# EAGLE board esp32_indoorbike (EAGLE 9.3.0)

Size 160 x 100 mm. Coordinates in mm from the lower left corner, seen from the top.
Outline: 0,0 160,0 160,100 0,100 0,0
Copper layers (1*16): Top 0.035mm / dielectric 1.5mm / Bottom 0.035mm
Design rules "default": minimum track width 6mil, minimum drill 0.35mm, track to track 6mil, track to pad 6mil, pad to pad 6mil, via to via 6mil, smd to smd 6mil, copper to edge 40mil, drill to drill 6mil, minimum pad ring 10mil, minimum via ring 8mil, stop-mask expansion 4mil, vias tented up to drill 0mil, thermal gap 10mil

## Footprints (pad centres in the part's own frame; a part is rotated, then mirrored left to right if it is on the bottom)
C3216 = smd 1.6 x 1.8: 1 -1.4,0; 2 1.4,0
D-7.5 = drill 0.813 long: A 3.81,0; C -3.81,0
MOLEX-1X4 = drill 1.016 pad 1.88 square: 1 0,0 | drill 1.016 pad 1.88: 2 2.54,0; 3 5.08,0; 4 7.62,0
MOLEX-1X3 = drill 1.016 pad 1.88 square: 1 0,0 | drill 1.016 pad 1.88: 2 2.54,0; 3 5.08,0
SOT223 = smd 1.5 x 2: 1 -2.3,-3.15; 2 0,-3.15; 3 2.3,-3.15 | smd 3.8 x 2: 4 0,3.15
SPC4077 = drill 0.8 pad 2.184 long: 1 -3,0; 2 0,-4.8 | drill 1 pad 2.184 long: 3 3,0
1X16 = drill 1.016 pad 1.88: 1 0,0; 2 2.54,0; 3 5.08,0; 4 7.62,0; 5 10.16,0; 6 12.7,0; 7 15.24,0; 8 17.78,0; 9 20.32,0; 10 22.86,0; 11 25.4,0; 12 27.94,0; 13 30.48,0; 14 33.02,0; 15 35.56,0; 16 38.1,0
LED5MM = drill 0.813 octagon: A -1.27,0; K 1.27,0
R3216 = smd 1.6 x 1.8: 1 -1.4,0; 2 1.4,0
1X08_NO_SILK = drill 1.016 pad 1.88: 1 0,0; 2 2.54,0; 3 5.08,0; 4 7.62,0; 5 10.16,0; 6 12.7,0; 7 15.24,0; 8 17.78,0
255SB = drill 1.118 long: 1 -3.81,0; 2 0,0; 3 3.81,0

## Placement (x,y rotation side)
C3  10uF  [C3216]  26.67,20.32 90 top
C4  10uF  [C3216]  30.48,20.32 270 top
D1  [D-7.5]  20.32,10.16 270 top
DISPLAY  [MOLEX-1X4]  95.25,16.51 0 top
HEARTRATE  [MOLEX-1X3]  78.74,16.51 0 top
IC1  LD117AS50TR  [SOT223]  20.32,21.59 0 top
J1  DC2020  [SPC4077]  11.43,10.16 0 top
J2  [1X16]  8.89,63.5 0 top
J3  [1X16]  8.89,77.47 0 top
LED1  [LED5MM]  29.21,12.7 0 top
LED2  [LED5MM]  38.1,12.7 0 top
MAGNET  [MOLEX-1X3]  66.04,16.51 0 top
R1  1K  [R3216]  20.32,29.21 0 top
R2  1K  [R3216]  20.32,34.29 0 top
RFID  [1X08_NO_SILK]  123.19,24.13 0 top
S1  [255SB]  6.35,30.48 90 top
SDCARD  [1X08_NO_SILK]  88.9,24.13 0 top

## Library data of the parts
C3 C4 R1 R2 = rcl
D1 = diode
DISPLAY = SparkFun-Connectors; PROD_ID: CONN-08186; SF_ID: PRT-08231
HEARTRATE MAGNET = SparkFun-Connectors; PROD_ID: CONN-08625; SF_ID: PRT-08096
IC1 = v-reg; SPICEPREFIX: J
J1 = con-jack; OC_FARNELL: unknown; OC_NEWARK: unknown
J2 J3 = SparkFun-Connectors
LED1 LED2 = led
RFID SDCARD = SparkFun-Connectors; PROD_ID: CONN-08438
S1 = switch

## Nets
3.3V: C4.1 IC1.4 J2.16 LED1.A
3V3_OUT: DISPLAY.1 HEARTRATE.2 MAGNET.2 RFID.1 SDCARD.2
3V_OUT: J2.1
EN: J2.14
GND: C3.2 C4.2 DISPLAY.2 HEARTRATE.1 IC1.1 J1.1 J1.2 J3.1 J3.16 MAGNET.1 R1.2 R2.2 RFID.3 SDCARD.3
IO0: J3.13
IO2: J3.14
IO4: J3.12 SDCARD.7
IO5: J3.9 LED2.A
IO12: J2.12 RFID.8
IO13: J2.13 RFID.2
IO14: HEARTRATE.3 J2.11
IO15: J3.15 MAGNET.3
IO16: J3.11
IO17: J3.10
IO18: J3.8 RFID.7 SDCARD.4
IO19: J3.7 RFID.5 SDCARD.5
IO21: DISPLAY.4 J3.6
IO22: DISPLAY.3 J3.3
IO23: J3.2 RFID.6 SDCARD.6
IO25: J2.8
IO26: J2.9
IO27: J2.10
IO32: J2.6
IO33: J2.7
IO34: J2.5
N$1: C3.1 IC1.3 S1.2
N$2: LED1.K R1.1
N$3: D1.A J1.3
N$4: D1.C S1.1
N$5: LED2.K R2.1
RST: J2.2
RXD0: J3.5
TXD0: J3.4
USB: J2.15
VN: J2.4
VP: J2.3

## Tracks (layer width: path | path; a pad name or v marks a point on that pad's centre or on a via)
3.3V  (3 unrouted)
3V3_OUT  (4 unrouted)
GND  (13 unrouted)
IO4  (1 unrouted)
IO5  (1 unrouted)
IO12  (1 unrouted)
IO13  (1 unrouted)
IO14  (1 unrouted)
IO15  (1 unrouted)
IO18  (2 unrouted)
IO19  (2 unrouted)
IO21  (1 unrouted)
IO22  (1 unrouted)
IO23  (2 unrouted)
N$1  (2 unrouted)
N$2  (1 unrouted)
N$3  (1 unrouted)
N$4  (1 unrouted)
N$5  (1 unrouted)